# Altium PCB RF-433RX_P1.PcbDoc
Units mm, origin at the board's own origin, x right, y up, seen from the top; angles counter-clockwise.
Board outline 13.79 x 24.04 mm, 2 copper layers (Top Layer, Bottom Layer), stack 1.071 mm thick; 26 components, 19 nets, 81 pads, 43 vias.
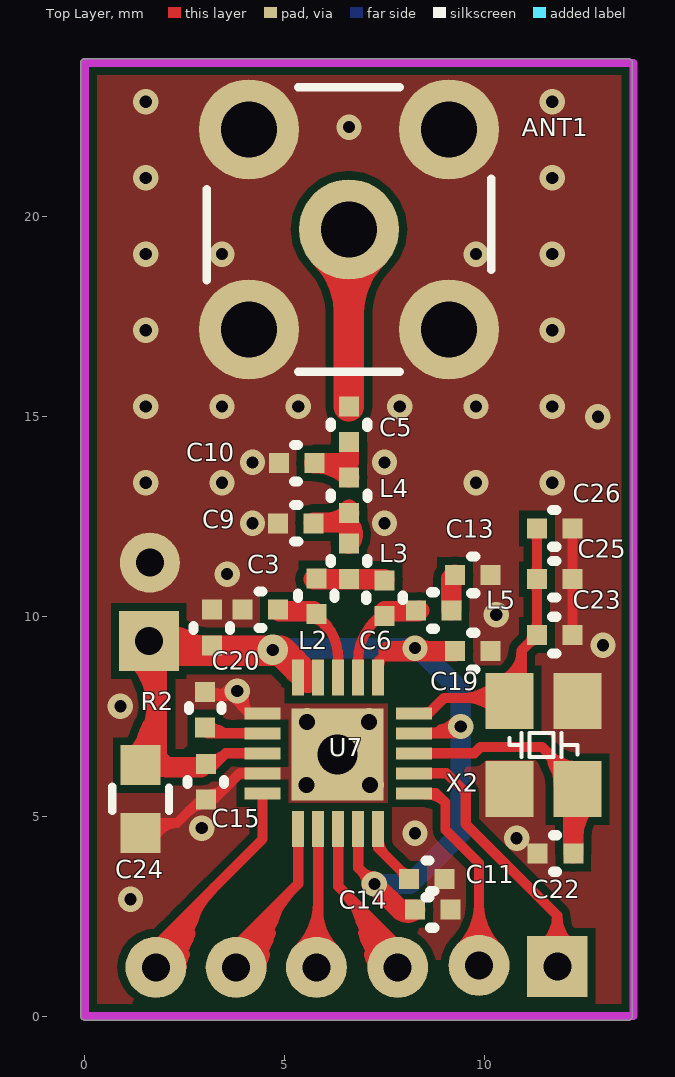
[diagram p0: Top Layer view]
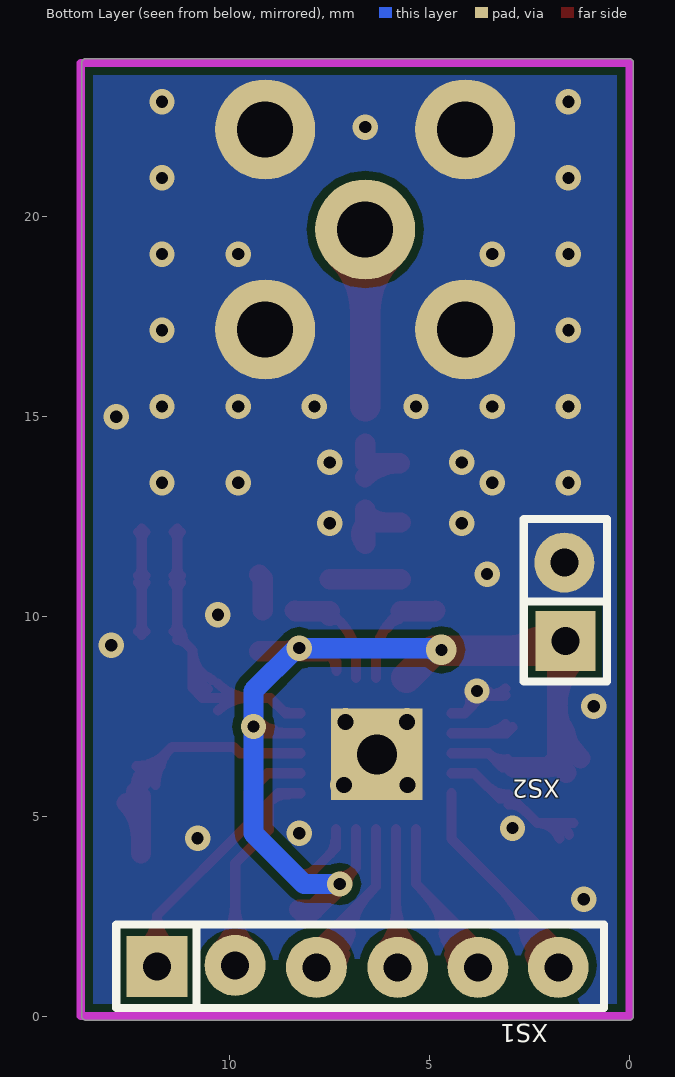
[diagram p1: Bottom Layer view, seen from below]

## Layer stack, top to bottom
Top Layer: signal copper 0.0356
Dielectric: core 1, FR-4, Dk 4.8
Bottom Layer: signal copper 0.0356

## Board outline
0,-0.102 cw(c0,0) -0.102,0 -0.102,23.832 cw(c0,23.832) 0,23.934 13.589,23.934 cw(c13.589,23.832) 13.691,23.832 13.691,0 cw(c13.589,0) 13.589,-0.102

## Design rules (kind name [scope] priority, off if disabled: settings)
Clearance [All] p1: gap=0.203
FabricationTestPointUsage TestPointUsage [All] p1: valid=0 allowmultiple=FALSE
FabricationTestpoint Testpoint [All] p1: side=3 testpointundercomponent=TRUE minsize=1.016 maxsize=2.54 preferedsize=1.524 minholesize=0 maxholesize=1.016 preferedholesize=0.813 testpointgrid=0.025 allowsidetop=TRUE allowsidebottom=TRUE usegrid=TRUE gridtolerance=0
PolygonConnect [All] p1: connectstyle=Direct reliefconductorwidth=0.254 reliefentries=4 polygonreliefangle="90 Angle"
RoutingVias [All] p1: holewidth=0.711 width=1.27 viastyle="Through Hole" minholewidth=0.711 minwidth=1.27 maxholewidth=0.711 maxwidth=1.27
SilkscreenOverComponentPads [All] p1: minsilkscreentomaskgap=0.254
SolderMaskExpansion [All] p1: expansion=0.102
Width [All] p1: maxlimit=1.016 minlimit=0.254 preferedwidth=0.508 minimp=50.000000 maximp=50.000000 favimp=50.000000
25 further rules are at their usual default settings.

## Classes and differential pairs
component class RF-433RX: ANT1 C3 C5 C6 C9 C10 C11 C13 C14 C15 C19 C20 C22 C23 C24 L2 L3 L4 L5 R2 U7 X2 XS1 XS2

## Components (designator, comment, footprint, x,y, rotation, side; value= is the part's Value field where it differs from the comment)
ANT1 "" INT01 6.604,19.666 r0 top
C3 "5.6P" cc0402 3.937,10.16 r0 top
C5 "220P" cc0402 6.604,15.24 r270 top
C6 "5.6P" cc0402 7.493,9.999 r90 top
C9 "6.8P" cc0402 4.826,12.319 r0 top
C10 "8.2P" cc0402 5.74,13.824 r180 top
C11 "100nF" cc0402 8.109,3.429 r0 top
C13 "220P" cc0402 9.252,11.03 r0 top
C14 "100nF" cc0402 9.144,2.667 r180 top
C15 "100nF" cc0402 3.026,6.306 r270 top
C19 "100nF" cc0402 9.252,9.125 r0 top
C20 "100nF" cc0402 3.175,10.16 r270 top
C22 "18P" cc0402 12.211,4.064 r180 top
C23 "20P" cc0402 12.192,9.525 r180 top
C24 "10uF" cc0603 1.397,4.572 r90 top
C25 "20P" cc0402 12.192,10.922 r180 top (schematic designator C23)
C26 "20P" cc0402 12.192,12.192 r180 top (schematic designator C23)
L2 "27nH" ind0402 5.786,10.051 r90 top
L3 "22nH" ind0402 6.604,10.922 r90 top
L4 "27nH" ind0402 6.607,13.465 r270 top
L5 "27nH" ind0402 9.163,10.141 r180 top
R2 "56k" res0402 3.008,8.107 r270 top
U7 "CC1100" QFN-20 5.334,4.68 r90 top locked
X2 "26MHz" XTAL-2X3 12.319,7.874 r270 top
XS1 "CON6" J6-2.0G 11.811,1.219 r270 bottom
XS2 "CON2" J2-2.0G 1.6,9.379 r0 bottom

## Footprints (in the part's own frame and the unit in brackets; to place one, negate y for a bottom-side part, rotate by r counter-clockwise, add the part's x,y. Pads: shape width x height; smd on the part's side, far side on the other; paste and mask are expansions set on the pad)
cc0402 [mm] "0402 Capacitor SMD - Startronic"
  rect 0.5x0.5 smd: 1(0,0) 2(0.889,0)
  silkscreen extent 0.41,-0.46 0.51,0.46, body extent 0,-0.25 0.89,0.25, height 0.4
cc0603 [mm] "0603 Capacitor SMD - Startronics"
  rect 1x1 smd: 1(0,0) 2(1.7,0)
  silkscreen extent 0.56,-0.71 1.17,0.71, body extent 0,-0.41 1.73,0.41, height 0.8
ind0402 [mm] "0402 Inductor SMD - Startronic"
  rect 0.5x0.5 smd: 1(0,0) 2(0.889,0)
  silkscreen extent 0.41,-0.46 0.51,0.46, body extent 0,-0.25 0.9,0.25, height 0.4
INT01 [mm]
  round 2.5 hole 1.4: 1(0,0) 2(-2.5,-2.5) 2(-2.5,2.5) 2(2.5,-2.5) 2(2.5,2.5)
  silkscreen extent -3.56,-3.56 3.56,3.56, body extent -2.98,-3.03 3.02,2.97, height 8.5
J2-2.0G [mm]
  rect 1.5x1.5 hole 0.7: 1(0,0)
  round 1.5 hole 0.7: 2(0.026,-1.956)
  silkscreen extent -1.04,-3.05 1.04,1.02, body extent -0.97,-2.95 1.03,1.05, height 5.4
J6-2.0G [mil]
  rect 60x60 hole 27.56: 1(-0.98,0)
  round 60 hole 27.56: 2(-2,77) 3(0,157) 4(0,237) 5(0,316) 6(0,395)
  silkscreen extent -42,-40 40,440, body extent -40,-40 38,432, height 256
QFN-20 [mm]
  rect 2.3x2.3 smd: 0(1.865,-0.982)
  rect 2.286x2.286 hole 1: 0(1.865,-0.982)
  rect 0.9x0.3 smd: 1(0,0) 2(0,-0.5) 3(0,-1) 4(0,-1.5) 5(0,-2) 11(3.78,-2) 12(3.78,-1.5) 13(3.78,-1) 14(3.78,-0.5) 15(3.78,0)
  rect 0.3x0.9 smd: 6(0.89,-2.89) 7(1.39,-2.89) 8(1.89,-2.89) 9(2.39,-2.89) 10(2.89,-2.89) 16(2.89,0.89) 17(2.39,0.89) 18(1.89,0.89) 19(1.39,0.89) 20(0.89,0.89)
  body extent 0,-2.84 3.81,0.91, height 1
res0402 [mm] "0402 Resistor SMD - Startronic"
  rect 0.5x0.5 smd: 1(0,0) 2(0.889,0)
  silkscreen extent 0.36,-0.41 0.46,0.41, body extent 0,-0.25 0.89,0.25, height 0.2
XTAL-2X3 [mm] "CRYSTAL SMD 2x3x1mm 4 pad"
  rect 1.4x1.2 smd: 1(0,0) 2(0,-1.7) 3(2.2,-1.7) 4(2.2,0)
  silkscreen extent 0.8,-1.7 1.4,0, body extent -0.36,-1.88 2.54,0.2, height 1

## Part data
ANT1: library part ANTENNA, "Generic Antenn"
C3 C5 C6 C9 C10 C11 C13 C14 C15 C19 C20 C22 C23 C24 C25 C26: library part CAP
L2 L3 L4 L5: library part INDUCTOR
R2: library part RES
U7: library part Component_
X2: library part XO53
XS1 XS2: "Connecto"

## Via types
v1: diameter 0.635, hole 0.305, Top Layer to Bottom Layer, tented both sides, 38 vias
v2: diameter 0.7, hole 0.4, Top Layer to Bottom Layer, tented both sides, 4 vias
v3: diameter 0.762, hole 0.305, Top Layer to Bottom Layer, tented both sides, 1 vias

## Nets (pads, with @x,y where several pads share a name; then routed paths per layer and width w, separated by ;. In a path a pad name is that pad's centre, name@x,y a point inside that pad or via, vN(x,y) a via of type N, cw(c..) or ccw(c..) an arc to the next point about the centre after c; other vN are vias at no path point)
+3.3V: C14.2 C15.1 C19.1 C20.2 C24.2 U7.4 U7.9 U7.11 U7.14 U7.15 U7.18 XS2.1 | length 52.1
  Top Layer w0.254: XS2.1@1.626,9.379 ccw(c1.672,9.425) XS2.1@1.672,9.36 ; C15.1@2.902,6.223 3.175,6.223 3.522,6.57 ; U7.18 3.522,6.57 ; U7.14@5.81,8.491 U7.14@5.81,8.541 ; U7.4 6.834,3.707 v1(7.239,3.302) ; v1@7.049,3.304 ccw(c6.601,3.307) 6.914,3.627 ; v1@7.049,3.307 ccw(c6.626,3.318) 6.921,3.62 ccw(c7.223,3.915) v1@7.234,3.492 ; v1@7.237,3.492 cw(c7.234,3.94) 6.914,3.627 ; U7.11@7.324,8.63 7.324,8.848 7.601,9.125 ; U7.9 9.229,7.07 v1(9.398,7.239) ; 8.89,7.158 cw(c9.043,6.895) v1@9.261,7.107 ; 3.522,6.57 cw(c3.152,6.94) 3.05,6.427 ccw(c3.152,6.94) 3.522,6.57 ; 6.914,3.627 cw(c6.589,3.302) 7.048,3.302 ccw(c6.589,3.302) 6.914,3.627 ; 6.914,3.627 ccw(c7.239,3.952) 7.239,3.492 cw(c7.239,3.952) 6.914,3.627 ; 6.923,3.618 cw(c6.607,3.309) 7.049,3.304 ccw(c6.607,3.309) 6.923,3.618 ; 6.923,3.618 ccw(c7.232,3.934) 7.237,3.492 cw(c7.232,3.934) 6.923,3.618 ; U7.11@7.357,8.76 cw(c7.649,8.76) 7.443,8.967 ccw(c7.649,8.76) U7.11@7.357,8.76 ; U7.9@8.53,7.07 ccw(c8.53,8.107) 9.263,7.374 cw(c8.53,8.107) U7.9@8.53,7.07
  Top Layer w0.508: C24.2@1.622,6.371 cw(c2.486,6.748) 1.67,7.22 ; XS2.1@1.806,9.199 1.806,6.449 2.032,6.223 ; C15.1@2.902,6.223 2.032,6.223 ; v1(7.239,3.302) 7.874,2.667 ; 7.601,9.125 7.999,9.125 C19.1 ; C14.2@8.236,2.667 7.874,2.667 ; 2.032,6.223 cw(c2.032,6.808) 1.585,6.431 ccw(c2.032,6.808) 2.032,6.223 ; 7.874,2.667 ccw(c8.067,2.86) 8.258,2.664 cw(c8.067,2.86) 7.874,2.667 ; C24.2@1.223,6.446 ccw(c-0.185,7.854) 1.806,7.854 cw(c-0.185,7.854) C24.2@1.223,6.446 ; XS2.1@1.249,9.028 cw(c-0.095,7.684) 1.806,7.684 ccw(c-0.095,7.684) XS2.1@1.249,9.028 ; C24.2@1.571,6.446 ccw(c2.109,6.984) 2.109,6.223 cw(c2.109,6.984) C24.2@1.571,6.446 ; C24.2@1.582,6.087 ccw(c1.042,6.627) 1.806,6.627 cw(c1.042,6.627) C24.2@1.582,6.087 ; 7.924,9.125 ccw(c7.924,9.53) 8.21,9.244 cw(c7.924,9.53) 7.924,9.125 ; v1@8.3,9.244 ccw(c8.586,9.53) 8.586,9.125 cw(c8.586,9.53) v1@8.3,9.244
  Top Layer w0.762: XS2.1@1.672,9.36 1.9,9.131 4.903,9.131 5.574,8.46 ; XS2.1@1.903,9.169 cw(c2.25,8.928) 2.461,9.293 ; XS2.1@1.861,9.64 ccw(c3.089,10.868) 3.089,9.131 cw(c3.089,10.868) XS2.1@1.861,9.64 ; U7.15@5.334,8.691 cw(c5.334,8.668) 5.35,8.684 ccw(c5.334,8.668) U7.15@5.334,8.691
  Bottom Layer w0.508: v3(4.699,9.156) 4.699,9.162 4.736,9.199 8.327,9.199 9.398,8.128 v1(9.398,7.239) 9.398,4.572 8.128,3.302 v1(7.239,3.302) ; v3@4.789,9.066 cw(c5.108,8.747) 5.108,9.199 ccw(c5.108,8.747) v3@4.789,9.066
  other v1: 8.255,9.199
DGND: ANT1.2 C3.1 C9.1 C10.2 C11.2 C13.2 C14.1 C15.2 C19.2 C20.1 C22.2 C23.1 C24.1 C25.1 C26.1 R2.1 U7.0 U7.16 U7.19 X2.1 X2.3 XS2.2 | length 19.1
  Top Layer w0.254: C24.1@1.397,4.826 2.305,4.826 ; R2.1@3.098,8.023 cw(c3.236,7.894) 3.331,8.058 ; v1@3.857,8.171 cw(c3.506,7.85) 3.981,7.829 ; U7.19 3.877,6.07 3.249,5.442 2.921,5.442 2.305,4.826 ; U7.16 U7.16@4.114,7.57 ; C25.1@12.105,11.009 ccw(c11.895,11.219) 12.192,11.219 ccw(c12.489,11.219) C25.1@12.279,11.009 ; C26.1@12.105,12.105 cw(c11.895,11.895) 12.192,11.895 cw(c12.489,11.895) C26.1@12.279,12.105 ; C23.1 C25.1 C26.1 ; 2.305,4.826 ccw(c2.305,4.228) 1.746,4.44 cw(c2.305,4.228) 2.305,4.826 ; R2.1@3.175,8.001 ccw(c3.175,8.604) 3.658,8.242 cw(c3.175,8.604) R2.1@3.175,8.001 ; R2.1@3.175,8.001 3.683,8.001 U7.16@4.114,7.57 ; U7.16@4.114,7.57 cw(c4.465,7.921) 3.992,8.071 ccw(c4.465,7.921) U7.16@4.114,7.57 ; 12.192,9.822 cw(c11.895,9.822) 12.105,9.612 ccw(c11.895,9.822) 12.192,9.822 ; 12.192,9.822 ccw(c12.489,9.822) 12.279,9.612 cw(c12.489,9.822) 12.192,9.822 ; 12.192,10.625 cw(c12.489,10.625) 12.279,10.835 ccw(c12.489,10.625) 12.192,10.625 ; 12.192,10.625 ccw(c11.895,10.625) 12.105,10.835 cw(c11.895,10.625) 12.192,10.625 ; C24.1@1.508,4.53 cw(c1.937,4.367) 1.937,4.826 ccw(c1.937,4.367) C24.1@1.508,4.53 ; 2.595,5.116 cw(c3.026,4.685) 3.026,5.294 ccw(c3.026,4.685) 2.595,5.116 ; C15.2@3.026,5.54 ccw(c3.026,6.317) 3.575,5.768 cw(c3.026,6.317) C15.2@3.026,5.54 ; R2.1@3.095,8.194 ccw(c3.561,8.66) 3.561,8.001 cw(c3.561,8.66) R2.1@3.095,8.194
  other v1: 1.143,2.921 10.795,4.445 8.255,4.572 2.921,4.699 0.889,7.747 3.81,8.128 12.954,9.271 10.287,10.033 3.556,11.049 4.191,12.319 7.493,12.319 1.524,13.335 3.429,13.335 9.779,13.335 11.684,13.335 4.191,13.843 7.493,13.843 12.827,14.986 1.524,15.24 3.429,15.24 5.334,15.24 7.874,15.24 9.779,15.24 11.684,15.24 1.524,17.145 11.684,17.145 1.524,19.05 3.429,19.05 9.779,19.05 11.684,19.05 1.524,20.955 11.684,20.955 6.604,22.225 1.524,22.86 11.684,22.86
  other v2: 5.545,5.774 7.128,5.783 5.554,7.358 7.103,7.358
GDO0A: U7.6 XS1.2 | length 13.6
  Top Layer w0.254: U7.6 8.781,5.57 9.017,5.334 9.017,4.66 9.855,3.822 XS1.2@9.855,1.708 ; 9.855,2.19 cw(c8.935,2.19) 9.586,1.539 ccw(c8.935,2.19) 9.855,2.19 ; 9.855,2.19 ccw(c10.775,2.19) 10.125,1.539 cw(c10.775,2.19) 9.855,2.19 ; 9.855,2.803 cw(c8.322,2.803) 9.406,1.719 ccw(c8.322,2.803) 9.855,2.803 ; 9.855,2.803 ccw(c11.388,2.803) 10.304,1.719 cw(c11.388,2.803) 9.855,2.803 ; U7.6@8.524,5.547 cw(c8.524,4.871) 9.002,5.349 ccw(c8.524,4.871) U7.6@8.524,5.547
GDO2A: U7.3 XS1.3 | length 18.9
  Top Layer w0.254: U7.3 6.334,3.248 XS1.3@7.823,1.759 ; 6.817,2.604 ccw(c8.718,3.114) XS1.3@7.877,1.334 ; 6.959,2.075 ccw(c8.411,2.464) XS1.3@7.769,1.104 ; 7.101,1.545 ccw(c8.104,1.814) XS1.3@7.66,0.875 ; 7.227,2.023 ccw(c8.189,2.281) XS1.3@7.865,1.339 ; 6.357,3.225 cw(c4.352,1.219) 7.188,1.219 ccw(c4.352,1.219) 6.357,3.225 ; 6.791,2.791 cw(c5.219,1.219) 7.442,1.219 ccw(c5.219,1.219) 6.791,2.791 ; 7.225,2.357 cw(c6.086,1.219) 7.696,1.219 ccw(c6.086,1.219) 7.225,2.357
MISO: U7.2 XS1.4 | length 10.6
  Top Layer w0.254: XS1.4@5.791,1.759 5.834,1.802 U7.2 ; XS1.4@5.342,1.668 ccw(c4.155,2.856) 5.834,2.856 cw(c4.155,2.856) XS1.4@5.342,1.668 ; XS1.4@5.522,1.489 ccw(c4.768,2.242) 5.834,2.242 cw(c4.768,2.242) XS1.4@5.522,1.489 ; 5.834,2.036 ccw(c6.608,2.036) 6.061,1.489 cw(c6.608,2.036) 5.834,2.036 ; 5.834,2.649 ccw(c7.221,2.649) 6.24,1.668 cw(c7.221,2.649) 5.834,2.649
MOSI: U7.20 XS1.6 | length 20.3
  Top Layer w0.254: XS1.6@1.724,1.334 ccw(c0.883,3.114) 2.784,2.604 ; XS1.6@1.737,1.339 ccw(c1.412,2.281) 2.374,2.023 ; XS1.6@1.778,1.759 4.444,4.425 U7.20 ; XS1.6@1.832,1.104 ccw(c1.19,2.464) 2.642,2.075 ; XS1.6@1.941,0.875 ccw(c1.497,1.814) 2.5,1.545 ; XS1.6@1.905,1.219 cw(c3.515,1.219) 2.376,2.357 ccw(c3.515,1.219) XS1.6@1.905,1.219 ; XS1.6@2.159,1.219 cw(c4.382,1.219) 2.81,2.791 ccw(c4.382,1.219) XS1.6@2.159,1.219 ; XS1.6@2.413,1.219 cw(c5.249,1.219) 3.244,3.225 ccw(c5.249,1.219) XS1.6@2.413,1.219
NetANT1_1: ANT1.1 C5.1 | length 11
  Top Layer w0.762: C5.1 ANT1.1 ; 6.604,17.568 cw(c8.702,17.568) 7.218,19.052 ccw(c8.702,17.568) 6.604,17.568 ; 6.604,17.568 ccw(c4.506,17.568) 5.99,19.052 cw(c4.506,17.568) 6.604,17.568
NetC3_2: C3.2 L2.1 U7.13 | length 3.5
  Top Layer w0.254: L2.1@5.715,10.122 5.932,9.905 cw(c4.962,8.935) 6.334,8.935 U7.13 ; L2.1@5.754,9.932 cw(c5.63,9.469) 6.045,9.709 ccw(c5.63,9.469) L2.1@5.754,9.932
  Top Layer w0.508: C3.2@4.845,10.141 4.864,10.122 L2.1@5.715,10.122
NetC5_2: C5.2 C10.1 L4.1 | length 3.3
  Top Layer w0.508: C10.1@5.734,13.824 6.585,13.824 6.604,13.843 C5.2@6.604,14.313 ; C10.1@5.749,13.824 cw(c5.749,12.607) 6.61,13.468 ccw(c5.749,12.607) C10.1@5.749,13.824
NetC6_1: C6.1 L5.2 U7.12 | length 3.8
  Top Layer w0.254: U7.12 6.834,8.895 cw(c8.206,8.895) 7.236,9.865 ; C6.1@7.493,10.122 7.236,9.865 ; 7.236,9.865 cw(c7.352,9.748) 7.433,9.892 ccw(c7.352,9.748) 7.236,9.865
  Top Layer w0.508: C6.1@7.493,10.122 8.344,10.122 L5.2@8.363,10.141 ; C6.1@7.49,10.002 cw(c7.78,9.712) 7.78,10.122 ccw(c7.78,9.712) C6.1@7.49,10.002
NetC6_2: C6.2 L2.2 L3.1 | length 1.8
  Top Layer w0.508: L2.2@5.715,10.922 C6.2@7.493,10.922
NetC9_2: C9.2 L3.2 L4.2 | length 6.3
  Top Layer w0.508: C9.2@5.717,12.338 L4.2@6.541,12.338 ; L3.2 6.604,12.275 ; L4.2@6.604,12.662 6.604,12.275 ; L4.2@6.541,12.338 cw(c6.234,12.031) 6.607,11.809 ccw(c6.234,12.031) L4.2@6.541,12.338 ; L4.2@6.541,12.338 6.604,12.275 ; 6.603,12.231 cw(c6.902,12.404) L4.2@6.603,12.578 ; 6.603,12.231 cw(c6.902,12.404) L4.2@6.603,12.578 ; 6.603,12.231 cw(c6.902,12.404) L4.2@6.603,12.578 ; 6.604,12.275 cw(c6.369,12.04) 6.607,11.808 ccw(c6.369,12.04) 6.604,12.275 ; 6.043,12.338 ccw(c6.043,13.14) 6.61,12.573 cw(c6.043,13.14) 6.043,12.338
NetC11_1: C11.1 U7.5 | length 3.3
  Top Layer w0.254: U7.5 7.334,4.204 C11.1 ; C11.1@7.899,3.639 cw(c7.689,3.429) 7.986,3.429 ccw(c7.689,3.429) C11.1@7.899,3.639 ; C11.1@7.899,3.639 ccw(c8.109,3.849) 8.109,3.552 cw(c8.109,3.849) C11.1@7.899,3.639 ; U7.5@7.357,4.38 ccw(c7.837,4.38) 7.498,4.04 cw(c7.837,4.38) U7.5@7.357,4.38
NetC13_1: C13.1 L5.1 | length 0.9
  Top Layer w0.508: L5.1 9.163,10.941 C13.1
NetC22_1: C22.1 U7.8 X2.4 | length 14.9
  Top Layer w0.254: U7.8 8.89,6.57 ; 9.103,6.57 8.89,6.57 ; 11.691,6.352 ccw(c12.524,6.576) X2.4@12.31,5.74 ; 11.815,6.382 cw(c11.624,5.669) X2.4@12.354,5.779 ; X2.4@12.206,5.59 12.206,5.955 11.43,6.731 9.896,6.731 9.735,6.57 8.89,6.57 ; 11.463,6.698 cw(c10.54,5.774) 11.846,5.774 ccw(c10.54,5.774) 11.463,6.698 ; 11.628,6.533 ccw(c12.319,7.225) 12.319,6.247 cw(c12.319,7.225) 11.628,6.533 ; X2.4@11.897,6.264 cw(c11.407,5.774) 12.1,5.774 ccw(c11.407,5.774) X2.4@11.897,6.264
  Top Layer w0.508: C22.1 12.211,5.487 X2.4@12.333,5.609 ; 12.211,4.478 cw(c13.415,4.478) 12.564,5.329 ccw(c13.415,4.478) 12.211,4.478
NetC23_2: C23.2 C25.2 C26.2 U7.10 X2.2 | length 18.1
  Top Layer w0.254: U7.10 8.596,7.57 8.976,7.95 10.666,7.95 10.922,8.206 10.922,9.144 ; C25.2@11.216,11.009 ccw(c11.006,11.219) 11.303,11.219 ccw(c11.6,11.219) C25.2@11.39,11.009 ; C26.2@11.216,12.105 cw(c11.006,11.895) 11.303,11.895 cw(c11.6,11.895) C26.2@11.39,12.105 ; C23.2@11.284,9.506 10.922,9.144 ; C23.2 C25.2 C26.2 ; 10.922,9.144 cw(c10.125,9.144) 10.435,8.41 ccw(c10.125,9.144) 10.922,9.144 ; C23.2@11.093,9.315 cw(c11.303,9.105) 11.303,9.402 ccw(c11.303,9.105) C23.2@11.093,9.315 ; C23.2@11.093,9.315 ccw(c10.883,9.525) 11.18,9.525 cw(c10.883,9.525) C23.2@11.093,9.315 ; 11.303,9.822 cw(c11.006,9.822) 11.216,9.612 ccw(c11.006,9.822) 11.303,9.822 ; 11.303,9.822 ccw(c11.6,9.822) 11.39,9.612 cw(c11.6,9.822) 11.303,9.822 ; 11.303,10.625 cw(c11.6,10.625) 11.39,10.835 ccw(c11.6,10.625) 11.303,10.625 ; 11.303,10.625 ccw(c11.006,10.625) 11.216,10.835 cw(c11.006,10.625) 11.303,10.625 ; U7.10@8.524,7.593 ccw(c8.524,7.823) 8.687,7.66 cw(c8.524,7.823) U7.10@8.524,7.593 ; 9.42,7.95 ccw(c9.42,9.173) 10.285,8.308 cw(c9.42,9.173) 9.42,7.95 ; 9.535,7.95 cw(c9.535,6.89) 10.285,7.64 ccw(c9.535,6.89) 9.535,7.95 ; X2.2@10.534,8.176 ccw(c10.287,8.761) 10.922,8.761 cw(c10.287,8.761) X2.2@10.534,8.176
NetR2_2: R2.2 U7.17 | length 3.2
  Top Layer w0.254: R2.2@2.921,7.22 3.071,7.07 U7.17 ; R2.2@3.079,7.117 cw(c3.248,6.877) 3.395,7.132 ; R2.2@3.095,7.305 ccw(c3.662,7.872) 3.662,7.07 cw(c3.662,7.872) R2.2@3.095,7.305
RF_CSA: U7.7 XS1.1 | length 9.8
  Top Layer w0.254: U7.7 9.043,6.07 9.525,5.588 9.525,4.799 11.811,2.513 ; XS1.1@11.811,1.734 11.811,2.513 ; 11.811,2.513 cw(c10.861,2.513) 11.43,1.753 ccw(c10.861,2.513) 11.811,2.513 ; 11.811,2.513 ccw(c12.761,2.513) 12.192,1.753 cw(c12.761,2.513) 11.811,2.513
SCLK: U7.1 XS1.5 | length 18.9
  Top Layer w0.254: XS1.5@3.73,1.334 ccw(c2.89,3.114) 4.791,2.604 ; XS1.5@3.743,1.339 ccw(c3.419,2.281) 4.381,2.023 ; XS1.5@3.785,1.759 5.334,3.308 U7.1 ; XS1.5@3.839,1.104 ccw(c3.197,2.464) 4.649,2.075 ; XS1.5@3.947,0.875 ccw(c3.504,1.814) 4.507,1.545 ; XS1.5@3.912,1.219 cw(c5.521,1.219) 4.383,2.357 ccw(c5.521,1.219) XS1.5@3.912,1.219 ; XS1.5@4.166,1.219 cw(c6.389,1.219) 4.817,2.791 ccw(c6.389,1.219) XS1.5@4.166,1.219 ; XS1.5@4.42,1.219 cw(c7.256,1.219) 5.25,3.225 ccw(c7.256,1.219) XS1.5@4.42,1.219

## Polygon pours and split planes (outlines as drawn)
DGND on Top Layer "Keep-Out Layer-No Net" (solid, remove dead copper, pour order 1000): 0.023,23.903 13.612,23.903 13.612,0.102 0.023,0.102
DGND on Bottom Layer "Keep-Out Layer-No Net" (solid, remove dead copper, pour order 1001): -0.094,23.833 13.495,23.833 13.495,0.032 -0.094,0.032

## Keep-outs
Keep-Out Layer:
  lines w0.203: 0,0 0,23.832 13.716,23.832 13.716,0 0,0